# EAGLE board MI_LED_Driver_B__SMALL (EAGLE 5.11)
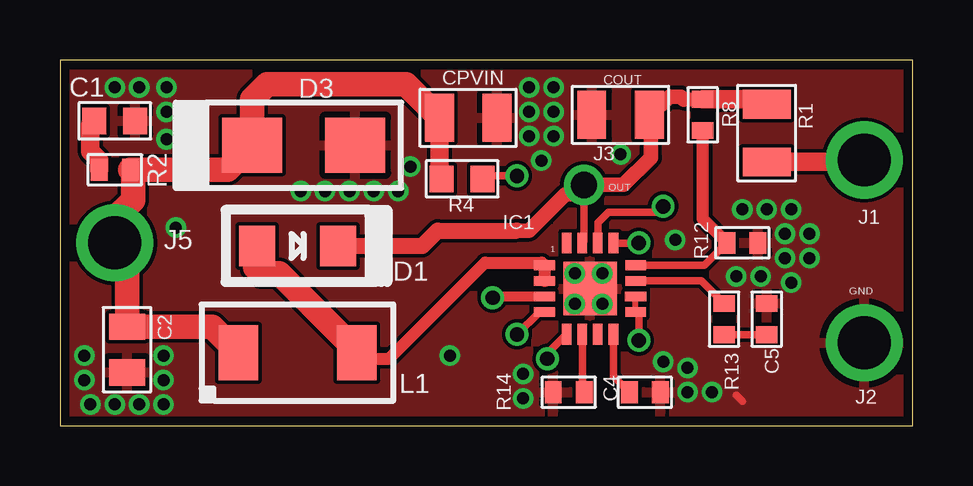
[diagram p0: board, top side]
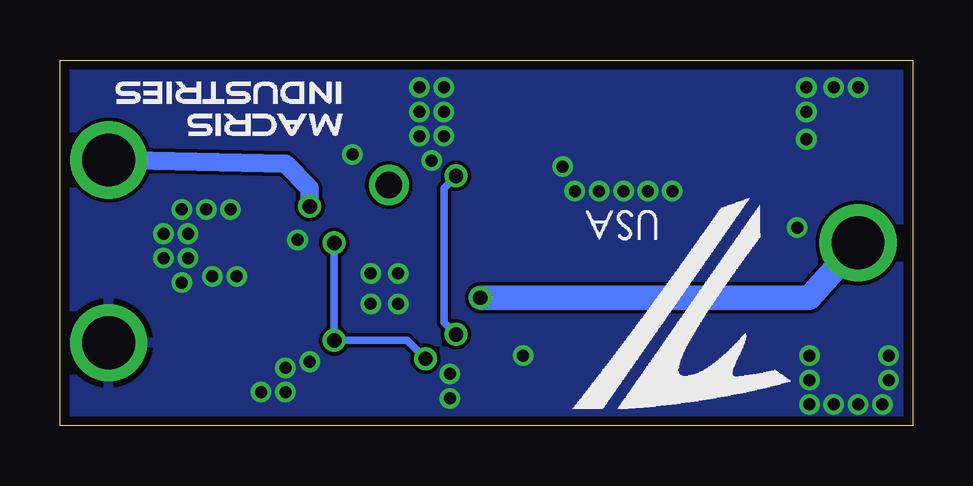
[diagram p1: board, bottom side, seen from below]

Size 35.56 x 15.24 mm. Coordinates in mm from the lower left corner, seen from the top.
Outline: 0,0 35.56,0 35.56,15.24 0,15.24 0,0
Copper layers (1*16): Top 0.0356mm / dielectric 1.5011mm / Bottom 0.0356mm
Design rules "oshPark": minimum track width 6mil, minimum drill 13mil, track to track 6mil, track to pad 6mil, pad to pad 6mil, via to via 6mil, smd to smd 6mil, copper to edge 15mil, drill to drill 6mil, minimum pad ring 7mil, minimum via ring 7mil, stop-mask expansion 4mil, vias tented up to drill 0mil, thermal gap 10mil

## Footprints (pad centres in the part's own frame; a part is rotated, then mirrored left to right if it is on the bottom)
C0603 = smd 1 x 1.1: 1 -0.85,0; 2 0.85,0
C0805 = smd 1.1 x 1.5: 1 -0.95,0; 2 0.95,0
C0402 = smd 0.7 x 0.9: 1 -0.65,0; 2 0.65,0
C1206 = smd 1.2 x 2: 1 -1.2,0; 2 1.2,0
DO-213AC-2 = smd 1.5 x 1.7: A -1.68,0; C 1.68,0
DO-214AA = smd 2.5 x 2.3: ANODE -2.15,0; CATH 2.15,0
QFN_SM = smd 0.87 x 0.4: 1 -1.9,0.975; 2 -1.9,0.325; 3 -1.9,-0.325; 4 -1.9,-0.975; 9 1.9,-0.975; 11 1.9,0.325; 12 1.9,0.975 | smd 0.4 x 0.87: 5 -0.975,-1.9; 6 -0.325,-1.9; 7 0.325,-1.9; 8 0.975,-1.9; 13 0.975,1.9; 14 0.325,1.9; 15 -0.325,1.9; 16 -0.975,1.9 | smd 0.9 x 0.4: 10 1.9,-0.325 | smd 2.225 x 2.225: GND 0,0
14AWG-SOLDERPOINT = drill 2.2 round: P$1 0,0
18AWG-SOLDERPOINT = drill 1.1 pad 1.676 round: 1 0,0
IND-COILTRONICS = smd 2.3 x 1.65: DOT 0,2.475; NO_DOT 0,-2.475
R1206 = smd 1.2 x 2: 1 -1.2,0; 2 1.2,0
R0402 = smd 0.7 x 0.9: 1 -0.65,0; 2 0.65,0
R0603 = smd 1 x 1.1: 1 -0.85,0; 2 0.85,0

## Placement (x,y rotation side)
C1  .1uF  [C0603]  2.29,12.7 0 top
C2  22uF,50V  [C0805]  2.79,3.17 270 top
C4  .01uF  [C0402]  24.38,1.4 0 top
C5  4.7nF  [C0402]  29.46,4.45 90 top
COUT  2.2uF,50V  [C1206]  23.37,12.95 180 top
CPVIN  1uF,50V  [C1206]  17.02,12.83 0 top
D1  SCHOTTKY-DO-213AC-2  [DO-213AC-2]  9.91,7.49 0 top
D3  [DO-214AA]  10.16,11.68 180 top
IC1  LT3517  [QFN_SM]  22.1,5.71 0 top
J1  HDR-1X1-14AWG  [14AWG-SOLDERPOINT]  33.53,11.07 0 top
J2  HDR-1X1-14AWG  [14AWG-SOLDERPOINT]  33.53,3.45 0 top
J3  HDR-1X1-18AWG_WIRE  [18AWG-SOLDERPOINT]  21.84,10.03 0 top
J5  HDR-1X1-14AWG  [14AWG-SOLDERPOINT]  2.29,7.62 0 top
L1  [IND-COILTRONICS]  9.91,3.05 90 top
R1  .3  [R1206]  29.46,12.19 270 top
R2  10  [R0402]  2.29,10.67 0 top
R4  51k  [R0603]  16.76,10.29 180 top
R8  392k  [R0402]  26.8,12.95 90 top
R12  10k  [R0402]  28.45,7.62 180 top
R13  3.3k  [R0402]  27.69,4.45 90 top
R14  16.5k  [R0402]  21.21,1.4 0 top
U$1  MI_LOGO-NAME_ONE  [MI_LOGO_NAME_1]  23.62,14.48 180 bottom
U$2  MI_LOGO-ONE  [MI_LOGO]  4.57,10.16 180 bottom

## Library data of the parts
C1 C2 C4 C5 COUT CPVIN D1 D3 L1 R1 R2 R4 R8 R12-R14 = Discrete
IC1 = IC
J1-J3 J5 = Mechanical
U$1 U$2 = Logo

## Nets
GND: C1.2 C2.2 C4.2 C5.2 COUT.2 CPVIN.2 D3.ANODE IC1.GND J2.P$1 R12.1 R14.1
LED_VCC: IC1.14 J1.P$1 R1.2
N$1: IC1.4 R4.1
N$2: IC1.5 IC1.9 IC1.10 IC1.13
N$3: C4.1 IC1.8
N$4: IC1.12 R8.1 R12.2
N$5: D1.A IC1.1 IC1.2 L1.NO_DOT
N$6: C5.1 R13.1
N$7: IC1.11 R13.2
N$8: IC1.6 R14.2
N$10: C1.1 R2.1
N$11: COUT.1 D1.C IC1.15 J3.1 R1.1 R8.2
VIN: C2.1 CPVIN.1 D3.CATH IC1.3 J5.P$1 L1.DOT R2.2 R4.2

## Tracks (layer width: path | path; a pad name or v marks a point on that pad's centre or on a via)
GND  (via drill 0.5)
  Top 0.254: IC1.GND 22.1,5.84 v22.61,6.35
  Top 0.305: 28.19,1.27 28.45,1.02
  other vias: 2.29,14.1 4.45,13.08 3.3,14.1 4.45,14.1 21.46,6.35 21.46,5.08 22.61,5.08 4.45,11.94 19.56,14.1 19.56,13.08 19.56,12.06 20.57,12.06 20.57,13.08 20.57,14.1 1.02,2.92 1.02,1.91 1.27,0.89 2.29,0.89 3.3,0.89 4.32,0.89 4.83,8.26 4.32,1.91 4.32,2.92 19.3,2.16 19.3,1.14 26.16,2.41 26.16,1.4 27.18,1.4 25.15,2.67 28.19,6.22 30.48,5.97 31.24,6.99 31.24,8 30.23,8 30.23,6.99 28.45,9.02 29.46,9.02 30.48,9.02 29.21,6.22 20.07,11.05 23.37,11.3 25.65,7.75 16.26,2.92 11.05,9.78 12.06,9.78 13.08,9.78 14.1,9.78 14.61,10.79 10.03,9.78
  pour Bottom: 0,15.24 35.56,15.24 35.56,0 0,0
  pour Top: 0,15.24 35.56,15.24 35.56,0 0,0
LED_VCC  (via drill 0.6)
  Top 0.305: IC1.14 22.42,8.45 22.86,8.89 24.89,8.89 v25.15,9.14
  Top 0.762: R1.2 33.46,10.99 J1.P$1
  Bottom 0.762: v25.15,9.14 25.15,9.91 26.16,10.92 J1.P$1
N$1  (via drill 0.6)
  Top 0.305: IC1.4 19.98,4.74 v19.05,3.81 | v19.05,10.41 17.74,10.41 R4.1
  Bottom 0.305: v19.05,3.81 19.56,4.32 19.56,9.91 v19.05,10.41
N$2  (via drill 0.6)
  Top 0.254: IC1.9 IC1.10
  Top 0.305: IC1.13 v24.12,7.62 v24.13,7.62 | v20.32,2.79 20.32,3.01 IC1.5 | v24.13,3.56 24.13,4.61 IC1.9
  Bottom 0.305: v24.13,7.62 v24.13,3.56 21.08,3.56 v20.32,2.79
N$3
  Top 0.305: IC1.8 23.07,2.06 C4.1
N$4
  Top 0.305: IC1.12 26.87,6.69 R12.2
  Top 0.508: R8.1 26.8,8.62 R12.2
N$5
  Top 0.508: IC1.2 IC1.1 20.09,6.8 17.72,6.8 13.72,2.79 12.63,2.79 L1.NO_DOT
  Top 1.016: L1.NO_DOT 12.38,3.11 9.14,6.35 8.38,6.35 8.13,6.6 8.13,7.39 D1.A
N$6
  Top 0.305: R13.1 C5.1
N$7
  Top 0.305: IC1.11 26.74,6.04 R13.2
N$8
  Top 0.305: IC1.6 21.77,1.48 R14.2
N$10
  Top 0.762: R2.1 1.64,11.06 1.27,11.43 1.27,12.53 C1.1
N$11
  Top 0.305: J3.1 21.84,7.69 IC1.15
  Top 0.61: R8.2 26.02,13.59 25.89,13.72 25.4,13.72 24.64,12.95 COUT.1 24.64,12.88 24.64,11.18 23.5,10.03 J3.1 21.46,9.65 21.08,9.65 19.56,8.13 19.05,8.13
  Top 0.66: D1.C 15.11,7.49 15.75,8.13 19.05,8.13
  Top 0.762: R8.2 29.42,13.6 R1.1
VIN  (via drill 0.6)
  Top 0.406: IC1.3 18.09,5.39 v18.03,5.33
  Top 0.762: CPVIN.1 15.82,10.56 R4.2
  Top 1.016: L1.DOT 6.35,4.12 C2.1 2.79,6.86 2.29,7.37 J5.P$1 2.29,8.64 3.05,9.4 3.05,10.56 R2.2 6.99,10.67 D3.CATH 8.01,13.6 8.64,14.22 14.42,14.22 CPVIN.1
  Bottom 1.016: v18.03,5.33 4.32,5.33 J5.P$1

## Text on the board
tNames: OUT | GND
Document: 1.4" | .164" | .6" | .3" | .3" | .136" | 1.23"